# Altium PCB H0AR4_PCB.PcbDoc (part 2 of 2)
Units mil, origin at the board's own origin, x right, y up, seen from the top; angles counter-clockwise.
Board outline 1363.78 x 1181.1 mil, 2 copper layers (Top Layer, Bottom Layer); 42 components, 27 nets, 117 pads, 19 vias.
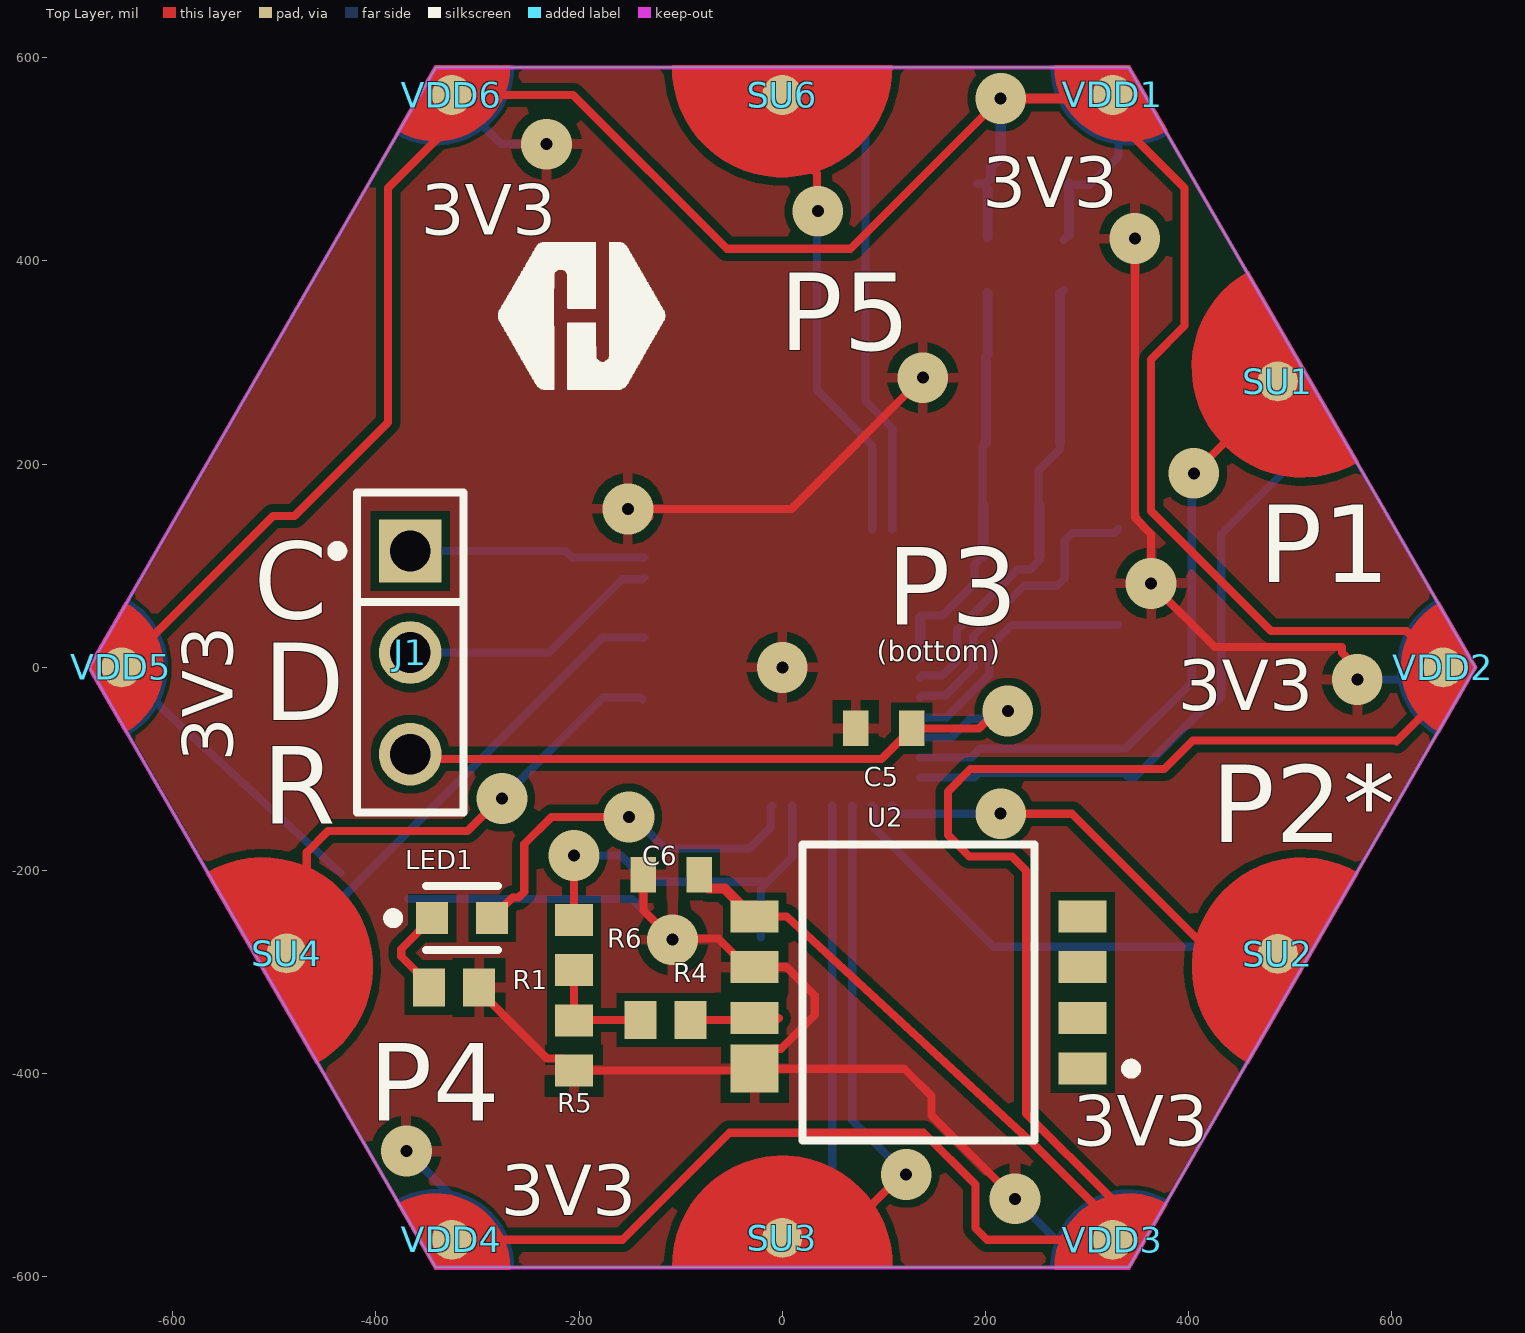
[diagram p0: Top Layer view]

## Via types
v1: diameter 50, hole 11.81, Top Layer to Bottom Layer, tented both sides, 19 vias

## Nets (pads, with @x,y where several pads share a name; then routed paths per layer and width w, separated by ;. In a path a pad name is that pad's centre, name@x,y a point inside that pad or via, vN(x,y) a via of type N, cw(c..) or ccw(c..) an arc to the next point about the centre after c; other vN are vias at no path point) (continued)
NetU1_9: (continued)
  Bottom Layer w8: U1.9 161.63,-49.21 204,-6.85 204,20 225.8,41.8 X1.P$1
NRST: C5.2 J1.3 U1.10 | length 706.4
  Top Layer w8: J1.3 -361.58,-90 97.56,-90 C5.2 193.63,-60 210.63,-43 v1(222,-43)
  Bottom Layer w8: U1.10 166.65,-68.9 185,-50.55 214.45,-50.55 v1(222,-43)
PRES_ADC: C7.2 R6.2 U1.18 | length 407.9
  Top Layer w8: R6.2 v1(-205,-185)
  Bottom Layer w8: v1(-205,-185) -158.6,-185 -132.6,-211 -14.49,-211 ; C7.2 -21,-217.51 -14.49,-211 ; U1.18 9.84,-186.67 -14.49,-211
UART1_RX: SD4.UART_D U1.32 | length 480.8
  Bottom Layer w8: SD4.UART_D -176.77,29.53 U1.32
UART1_TX: SU4.UART_U U1.29 | length 424.3
  Top Layer w8: -468,-212 -468,-182 -447,-161 -310,-161 -278,-129 v1(-276,-129)
  Bottom Layer w8: v1(-276,-129) -176.53,-29.53 -139.39,-29.53 U1.29@-137.61,-31.31
UART2_RX: SD2.UART_D U1.14 | length 405.7
  Bottom Layer w8: U1.14 90.36,-137.61 90.36,-157.53 207.83,-275 425,-275
UART2_TX: SU2.UART_U U1.13 | length 366.2
  Top Layer w8: v1(215,-144) 285,-144 414,-273
  Bottom Layer w8: U1.13 108.27,-142.09 110.17,-144 v1(215,-144)
UART3_RX: SD6.UART_D U1.48 | length 407.1
  Bottom Layer w8: 82,532 82,262 108.27,235.73 U1.48
UART3_TX: SU6.UART_U U1.47 | length 390.6
  Top Layer w8: 22,498 34,486 34,450 v1(35,449)
  Bottom Layer w8: v1(35,449) 34,448 34,273 88.58,218.42 U1.47
UART4_RX: SD1.UART_D U1.12 | length 587
  Bottom Layer w8: U1.12 189.15,-108.27 193.41,-104 337,-104 340.69,-107.69 347.31,-107.69 421,-34 427.31,-34 432,-29.31 432,131 499,198
UART4_TX: SU1.UART_U U1.11 | length 556.6
  Top Layer w8: v1(405,191) 439,225 443,225
  Bottom Layer w8: U1.11 186.2,-88.58 194.79,-80 338,-80 403,-15 403,189 v1(405,191)
UART5_RX: SD3.UART_D U1.16 | length 367.7
  Bottom Layer w8: 48,-503 49.21,-501.79 U1.16
UART5_TX: SU3.UART_U U1.15 | length 437.3
  Top Layer w8: 84,-533 118,-499 v1(122,-499)
  Bottom Layer w8: U1.15 68.9,-445.9 v1(122,-499)
VDD: C6.2 D1.2 FB1.1 U2.5 VDD1.Pwr_U VDD2.Pwr_U VDD3.Pwr_U VDD4.Pwr_U VDD5.Pwr_U VDD6.Pwr_U | length 4773.5
  Top Layer w8: VDD5.Pwr_U -501.39,149 -480,149 -388,241 -388,472 -334.97,525.03 -334.97,545.13 -325.2,554.9 VDD6.Pwr_U -205.89,563.39 -54.5,412 67,412 v1(215,560) ; VDD4.Pwr_U -157.39,-563.39 -52,-458 139,-458 190,-509 190,-552 201.39,-563.39 VDD3.Pwr_U 325.2,-542 ; C6.2 -81.57,-209.14 C6.2@-72.98,-217.74 ; -3.42,-245 4.46,-245 249.18,-470.88 ; 250.02,-471.65 249.18,-470.88 ; 298.02,-535.97 298.62,-537.01 301.68,-540.06 313.89,-542 325.2,-542 ; 315,-533 311.31,-533 249.18,-470.88 ; VDD1.Pwr_U 325.2,554.9 334.97,545.13 334.97,533.03 396,472 396,336.21 363,303.21 363,154 481,36 614.39,36 VDD2.Pwr_U 645.69,-4.7 645.69,-31.69 604.69,-72.69 604,-72 404,-72 376,-100 185,-100 163,-122 163,-165 184,-186 226,-186 240,-200 240,-439 322.86,-521.86 325.2,-524.2 325.2,-542
  Top Layer w10: C6.2@-72.98,-217.74 -56.55,-217.74 U2.5@-29.29,-245 ; v1(215,560) 280,560
  Bottom Layer w8: D1.2 199.6,476 D1.2@205.44,481.84
  Bottom Layer w10: FB1.1 D1.2@202,470.16 ; D1.2@205.44,481.84 205.44,492.44 215,502 v1(215,560)
VDDA: C1.2 C2.1 C3.2 C4.2 FB1.2 U1.4 U1.5 U1.6 | length 442.2
  Bottom Layer w8: U1.4 137.61,50.99 157.53,50.99 189.24,82.7 189.24,101.24 C1.2 ; C1.2@197.07,115.59 197.07,217.57 C2.1 ; C4.2 C4.2@202,307.5
  Bottom Layer w10: U1.6 U1.5 U1.4 ; C1.2 C3.2 ; C2.1 C4.2 ; C4.2@202,307.5 FB1.2
VSSA: C1.1 C2.2 C3.1 C4.1 R3.2 U1.7 | length 503.4
  Bottom Layer w8: U1.7 137.61,-8.06 157.53,-8.06 172,6.41 172,36.91 231.6,96.5 244.36,96.5 252.96,105.1 C1.1 ; C1.1@252.19,115.59 252.19,193.69 273.5,215 C2.2 ; R3.2@273.5,367.89 R3.2
  Bottom Layer w10: C1.1 C3.1 ; C2.2 C4.1 R3.2@273.5,367.89
pads on no net: U1.1 U1.2 U1.3 U1.17 U1.20 U1.21 U1.22 U1.23 U1.24 U1.25 U1.26 U1.27 U1.28 U1.30 U1.31 U1.33 U1.38 U1.39 U1.40 U1.41 U1.43 U1.44 U1.45 U1.46 U2.1 U2.2 U2.3 U2.4

## Polygon pours and split planes (outlines as drawn)
GND on Top Layer "GND_L01_P002" (solid, pour order 2): -685.85,0 -342,593 341.15,593 463.15,383 684.15,0 460.15,-388 341.15,-593 -295.85,-593 -342.85,-593
GND on Bottom Layer "GND_L02_P003" (solid, pour order 3): -342.29,593 -625.51,101.59 -685.2,-0.06 -342,-593 342,-593 455,-398 685,0 443,419 342,593

## Keep-outs
Keep-Out Layer:
  the board outline again, w3.94

## Silkscreen, mask and mechanical layers (free items; w line width, h text height)
Top Overlay:
  drawing of 1337 lines, arcs and shapes, not listed
  text "3V3" at 197,453.01 h50
  text "3V3" at -356,426.01 h50
  text "P5" at -3,312.02 h76
  text "P1" at 469,84.02 h76
  text "C" at -520,48.02 h76
  text "P3" at 103,42.02 h76
  text "(bottom)" at 93,6 h20
  text "3V3" at 389,-41.99 h50
  text "D" at -511,-51.98 h76
  text "3V3" at -541.01,-93 h50 r90
  text "R" at -512,-153.98 h76
  text "P2*" at 422,-171.98 h76
  text "P4" at -407,-445.98 h76
  text "3V3" at 286,-470.99 h50
  text "3V3" at -277,-538.99 h50
Bottom Overlay:
  text "GND" at -254.7,436.19 h50
  text "P5" at -83,428.02 h76
  text "GND" at 402.7,404.21 h32 r298.02
  text "H0AR4" at -27,253 h70
  text "P1" at 551,59.02 h76
  text "GND" at -540.01,35 h50 r90
  text "GND" at 603,-104.99 h50
  text "P2*" at 427,-204.98 h76
  text "GND" at 263,-427.01 h50 r180
  text "P4" at -281,-434.98 h76
  text "GND" at -297,-450.01 h50 r180
  text "P3" at -1,-451.98 h76
Top Solder:
  drawing of 20 lines, arcs and shapes, not listed
Dimensions:
  the board outline again, w3.94

## Text inside footprints (layer, text, board x,y; h text height)
C2: Mechanical 32 "1" at 190.5,221 h25 r180; Mechanical 32 "2" at 263.5,221 h25 r180; Mechanical 33 "C40" at 310.5,228.17 h25 r180
C4: Mechanical 32 "1" at 283.5,306 h25; Mechanical 32 "2" at 210.5,306 h25; Mechanical 33 "C40" at 163.5,298.83 h25